# EAGLE board real (EAGLE 9.3.0)

Size 127 x 142.24 mm. Coordinates in mm from the lower left corner, seen from the top.
Outline: 0,0 127,0 127,142.24 0,142.24 0,0
Copper layers (1*16): Top 0.035mm / dielectric 1.5mm / Bottom 0.035mm
Design rules "default": minimum track width 6mil, minimum drill 0.35mm, track to track 6mil, track to pad 6mil, pad to pad 6mil, via to via 6mil, smd to smd 6mil, copper to edge 40mil, drill to drill 6mil, minimum pad ring 10mil, minimum via ring 8mil, stop-mask expansion 4mil, vias tented up to drill 0mil, thermal gap 10mil

## Footprints (pad centres in the part's own frame; a part is rotated, then mirrored left to right if it is on the bottom)
0446200002 = drill 0.889 pad 1.422: 1 3.556,2.54; 2 2.54,4.318; 3 1.524,2.54; 4 0.508,4.318; 5 -0.508,2.54; 6 -1.524,4.318; 7 -2.54,2.54; 8 -3.556,4.318 | drill 1.575 pad 2.286: S@1 -8.103,3.429; S@2 8.103,3.429 | hole 3.251: 6.35,0; -6.35,0
NORCOMP_189-009-513R571 = drill 1.194 square: A1 0,0; B1 0,-6.579 | drill 1.194: A2 -2.769,0; A3 -5.537,0; A4 -8.306,0; A5 -11.074,0; A6 -1.384,-2.845; A7 -4.153,-2.845; A8 -6.921,-2.845; A9 -9.69,-2.845; B2 -2.769,-6.579; B3 -5.537,-6.579; B4 -8.306,-6.579; B5 -11.074,-6.579; B6 -1.384,-9.423; B7 -4.153,-9.423; B8 -6.921,-9.423; B9 -9.69,-9.423 | drill 3.048: SH1 6.96,-1.422; SH2 -18.034,-1.422; SH3 6.96,-9.423; SH4 -18.034,-9.423
D2PAK-KTT = smd 1.05 x 3.82: 1 -2.54,-10.3; 3 2.54,-10.3 | smd 8.55 x 7.48: 2 0,0
POWER_JACK_PTH = drill 2.997 pad 4.318: GND 0,7.7; GNDBREAK 4.7,10.7; PWR 0,13.7
1X02 = drill 1.016 long: 1 -1.27,0; 2 1.27,0
0207/12 = drill 0.813 octagon: 1 -6.35,0; 2 6.35,0
TSSOP28 = smd 0.305 x 0.991: 1 -4.225,-2.918; 2 -3.575,-2.918; 3 -2.925,-2.918; 4 -2.275,-2.918; 5 -1.625,-2.918; 6 -0.975,-2.918; 7 -0.325,-2.918; 8 0.325,-2.918; 9 0.975,-2.918; 10 1.625,-2.918; 11 2.275,-2.918; 12 2.925,-2.918; 13 3.575,-2.918; 14 4.225,-2.918; 15 4.225,2.918; 16 3.575,2.918; 17 2.925,2.918; 18 2.275,2.918; 19 1.625,2.918; 20 0.975,2.918; 21 0.325,2.918; 22 -0.325,2.918; 23 -0.975,2.918; 24 -1.625,2.918; 25 -2.275,2.918; 26 -2.925,2.918; 27 -3.575,2.918; 28 -4.225,2.918
CAN485 = drill 1: 2 -7.62,2.54; 3 -7.62,0; 4 -7.62,-2.54; 5 -7.62,-5.08; 6 -7.62,-7.62; 7 -7.62,-10.16; 8 -7.62,-12.7; 9 -7.62,-15.24; 10 7.62,-15.24; 11 7.62,-12.7; 12 7.62,-10.16; 13 7.62,-7.62; 485A -2.54,-15.24; 485B -5.08,-15.24; A0 7.62,-5.08; A1 7.62,-2.54; A2 7.62,0; A3 7.62,2.54; A4 5.08,6.35; A5 5.08,8.89; A6 -5.08,6.35; A7 -5.08,8.89; CANHI 2.54,-15.24; CANLO 5.08,-15.24; CTS -3.81,15.24; DTR 6.35,15.24; GND1 -7.62,5.08; GND2 7.62,10.16; GND3 0,-15.24; GND4 -6.35,15.24; RAW 7.62,12.7; RST 7.62,7.62; RST1 -7.62,7.62; RXI 1.27,15.24; RXI1 -7.62,10.16; TXO 3.81,15.24; TXO1 -7.62,12.7; VCC 7.62,5.08; VCC1 -1.27,15.24

## Placement (x,y rotation side)
CANBUS  RJ45-0446200002  [0446200002]  10.16,16.51 90 top
FET8-1:J1  NORCOMP_189-009-513R571  [NORCOMP_189-009-513R571]  55.08,17.76 0 top
FET8-1:U$2  NEXFET_CSD18542KTT  [D2PAK-KTT]  57.15,27.94 90 top
FET8-1:U$3  NEXFET_CSD18542KTT  [D2PAK-KTT]  57.15,38.94 90 top
FET8-1:U$4  NEXFET_CSD18542KTT  [D2PAK-KTT]  57.15,49.94 90 top
FET8-1:U$5  NEXFET_CSD18542KTT  [D2PAK-KTT]  57.15,60.94 90 top
FET8-1:U$6  NEXFET_CSD18542KTT  [D2PAK-KTT]  41.91,61.41 270 top
FET8-1:U$7  NEXFET_CSD18542KTT  [D2PAK-KTT]  41.91,50.41 270 top
FET8-1:U$8  NEXFET_CSD18542KTT  [D2PAK-KTT]  41.91,39.41 270 top
FET8-1:U$9  NEXFET_CSD18542KTT  [D2PAK-KTT]  41.91,27.14 270 top
FET8-2:J1  NORCOMP_189-009-513R571  [NORCOMP_189-009-513R571]  46.48,124.75 180 top
FET8-2:U$2  NEXFET_CSD18542KTT  [D2PAK-KTT]  45.72,116.84 270 top
FET8-2:U$3  NEXFET_CSD18542KTT  [D2PAK-KTT]  45.72,105.84 270 top
FET8-2:U$4  NEXFET_CSD18542KTT  [D2PAK-KTT]  45.72,94.84 270 top
FET8-2:U$5  NEXFET_CSD18542KTT  [D2PAK-KTT]  45.72,83.84 270 top
FET8-2:U$6  NEXFET_CSD18542KTT  [D2PAK-KTT]  59.69,83.37 90 top
FET8-2:U$7  NEXFET_CSD18542KTT  [D2PAK-KTT]  59.69,94.37 90 top
FET8-2:U$8  NEXFET_CSD18542KTT  [D2PAK-KTT]  59.69,105.37 90 top
FET8-2:U$9  NEXFET_CSD18542KTT  [D2PAK-KTT]  59.69,116.37 90 top
FET8-3:J1  NORCOMP_189-009-513R571  [NORCOMP_189-009-513R571]  106.05,17.59 0 top
FET8-3:U$2  NEXFET_CSD18542KTT  [D2PAK-KTT]  92.71,60.96 270 top
FET8-3:U$3  NEXFET_CSD18542KTT  [D2PAK-KTT]  92.71,49.96 270 top
FET8-3:U$4  NEXFET_CSD18542KTT  [D2PAK-KTT]  92.71,38.96 270 top
FET8-3:U$5  NEXFET_CSD18542KTT  [D2PAK-KTT]  92.71,27.96 270 top
FET8-3:U$6  NEXFET_CSD18542KTT  [D2PAK-KTT]  106.68,27.49 90 top
FET8-3:U$7  NEXFET_CSD18542KTT  [D2PAK-KTT]  106.68,38.49 90 top
FET8-3:U$8  NEXFET_CSD18542KTT  [D2PAK-KTT]  106.68,49.49 90 top
FET8-3:U$9  NEXFET_CSD18542KTT  [D2PAK-KTT]  106.68,60.49 90 top
FET8-4:J1  NORCOMP_189-009-513R571  [NORCOMP_189-009-513R571]  96.9,124.8 180 top
FET8-4:U$2  NEXFET_CSD18542KTT  [D2PAK-KTT]  110.49,82.55 90 top
FET8-4:U$3  NEXFET_CSD18542KTT  [D2PAK-KTT]  110.49,93.55 90 top
FET8-4:U$4  NEXFET_CSD18542KTT  [D2PAK-KTT]  110.49,104.55 90 top
FET8-4:U$5  NEXFET_CSD18542KTT  [D2PAK-KTT]  110.49,115.55 90 top
FET8-4:U$6  NEXFET_CSD18542KTT  [D2PAK-KTT]  96.52,116.02 270 top
FET8-4:U$7  NEXFET_CSD18542KTT  [D2PAK-KTT]  96.52,105.02 270 top
FET8-4:U$8  NEXFET_CSD18542KTT  [D2PAK-KTT]  96.52,94.02 270 top
FET8-4:U$9  NEXFET_CSD18542KTT  [D2PAK-KTT]  96.52,83.02 270 top
J2  POWER_JACK  [POWER_JACK_PTH]  -2.54,123.19 270 top
JP_CAN_TERM  [1X02]  24.13,92.71 90 top
JP_I2C  [1X02]  6.35,92.71 180 top
JP_RS485_TERM  [1X02]  17.78,92.71 90 top
R_CAN  120  [0207/12]  24.13,105.41 270 top
R_RS485  120  [0207/12]  17.78,105.41 90 top
R_SCL  4.7K  [0207/12]  7.62,105.41 90 top
R_SDA  4.7K  [0207/12]  3.81,105.41 90 top
RS485  RJ45-0446200002  [0446200002]  10.16,38.1 90 top
U1  [TSSOP28]  50.8,72.39 180 top
U2  [TSSOP28]  100.33,72.39 180 top
U$1  CAN485FULL_SOCKET  [CAN485]  12.7,68.58 180 top

## Library data of the parts
CANBUS RS485 = real_library; MF: MOLEX; MPN: 0446200002; OC_FARNELL: 9251910
FET8-1:J1 FET8-2:J1 FET8-3:J1 FET8-4:J1 = real_library; AVAILABILITY: Unavailable; DESCRIPTION: Conn D-Subminiature F/F 9/9 POS 2.77mm Solder RA Thru-Hole 18 Terminal 2 Port; MF: NorComp Inc.; MP: 189-009-513R571; PACKAGE: None; PRICE: None
FET8-1:U$2-FET8-1:U$9 FET8-2:U$2-FET8-2:U$9 FET8-3:U$2-FET8-3:U$9 FET8-4:U$2-FET8-4:U$9 U1 U2 U$1 = real_library
J2 = real_library; PROD_ID: CONN-08197
JP_CAN_TERM JP_I2C JP_RS485_TERM = pinhead
R_CAN R_RS485 R_SCL R_SDA = rcl; SPICEPREFIX: 120

## Nets
ENABLE: U1.23 U2.23 U$1.A0
GND: CANBUS.3 CANBUS.6 FET8-1:J1.A9 FET8-1:J1.B9 FET8-1:J1.SH1 FET8-1:J1.SH2 FET8-1:J1.SH3 FET8-1:J1.SH4 FET8-1:U$2.3 FET8-1:U$3.3 FET8-1:U$4.3 FET8-1:U$5.3 FET8-1:U$6.3 FET8-1:U$7.3 FET8-1:U$8.3 FET8-1:U$9.3 FET8-2:J1.A9 FET8-2:J1.B9 FET8-2:J1.SH1 FET8-2:J1.SH2 FET8-2:J1.SH3 FET8-2:J1.SH4 FET8-2:U$2.3 FET8-2:U$3.3 FET8-2:U$4.3 FET8-2:U$5.3 FET8-2:U$6.3 FET8-2:U$7.3 FET8-2:U$8.3 FET8-2:U$9.3 FET8-3:J1.A9 FET8-3:J1.B9 FET8-3:J1.SH1 FET8-3:J1.SH2 FET8-3:J1.SH3 FET8-3:J1.SH4 FET8-3:U$2.3 FET8-3:U$3.3 FET8-3:U$4.3 FET8-3:U$5.3 FET8-3:U$6.3 FET8-3:U$7.3 FET8-3:U$8.3 FET8-3:U$9.3 FET8-4:J1.A9 FET8-4:J1.B9 FET8-4:J1.SH1 FET8-4:J1.SH2 FET8-4:J1.SH3 FET8-4:J1.SH4 FET8-4:U$2.3 FET8-4:U$3.3 FET8-4:U$4.3 FET8-4:U$5.3 FET8-4:U$6.3 FET8-4:U$7.3 FET8-4:U$8.3 FET8-4:U$9.3 J2.GND J2.GNDBREAK RS485.5 U1.2 U1.3 U1.4 U1.5 U1.14 U1.24 U1.25 U2.1 U2.3 U2.4 U2.5 U2.14 U2.24 U2.25 U$1.GND2
HEATER_A0: FET8-1:J1.A8 FET8-1:J1.B8 FET8-1:U$2.2
HEATER_A1: FET8-1:J1.A7 FET8-1:J1.B7 FET8-1:U$3.2
HEATER_A2: FET8-1:J1.A6 FET8-1:J1.B6 FET8-1:U$4.2
HEATER_A3: FET8-1:J1.A5 FET8-1:J1.B5 FET8-1:U$5.2
HEATER_A4: FET8-1:J1.A4 FET8-1:J1.B4 FET8-1:U$6.2
HEATER_A5: FET8-1:J1.A3 FET8-1:J1.B3 FET8-1:U$7.2
HEATER_A6: FET8-1:J1.A2 FET8-1:J1.B2 FET8-1:U$8.2
HEATER_A7: FET8-1:J1.A1 FET8-1:J1.B1 FET8-1:U$9.2
HEATER_B0: FET8-2:J1.A8 FET8-2:J1.B8 FET8-2:U$2.2
HEATER_B1: FET8-2:J1.A7 FET8-2:J1.B7 FET8-2:U$3.2
HEATER_B2: FET8-2:J1.A6 FET8-2:J1.B6 FET8-2:U$4.2
HEATER_B3: FET8-2:J1.A5 FET8-2:J1.B5 FET8-2:U$5.2
HEATER_B4: FET8-2:J1.A4 FET8-2:J1.B4 FET8-2:U$6.2
HEATER_B5: FET8-2:J1.A3 FET8-2:J1.B3 FET8-2:U$7.2
HEATER_B6: FET8-2:J1.A2 FET8-2:J1.B2 FET8-2:U$8.2
HEATER_B7: FET8-2:J1.A1 FET8-2:J1.B1 FET8-2:U$9.2
HEATER_C0: FET8-3:J1.A8 FET8-3:J1.B8 FET8-3:U$2.2
HEATER_C1: FET8-3:J1.A7 FET8-3:J1.B7 FET8-3:U$3.2
HEATER_C2: FET8-3:J1.A6 FET8-3:J1.B6 FET8-3:U$4.2
HEATER_C3: FET8-3:J1.A5 FET8-3:J1.B5 FET8-3:U$5.2
HEATER_C4: FET8-3:J1.A4 FET8-3:J1.B4 FET8-3:U$6.2
HEATER_C5: FET8-3:J1.A3 FET8-3:J1.B3 FET8-3:U$7.2
HEATER_C6: FET8-3:J1.A2 FET8-3:J1.B2 FET8-3:U$8.2
HEATER_C7: FET8-3:J1.A1 FET8-3:J1.B1 FET8-3:U$9.2
HEATER_D0: FET8-4:J1.A8 FET8-4:J1.B8 FET8-4:U$2.2
HEATER_D1: FET8-4:J1.A7 FET8-4:J1.B7 FET8-4:U$3.2
HEATER_D2: FET8-4:J1.A6 FET8-4:J1.B6 FET8-4:U$4.2
HEATER_D3: FET8-4:J1.A5 FET8-4:J1.B5 FET8-4:U$5.2
HEATER_D4: FET8-4:J1.A4 FET8-4:J1.B4 FET8-4:U$6.2
HEATER_D5: FET8-4:J1.A3 FET8-4:J1.B3 FET8-4:U$7.2
HEATER_D6: FET8-4:J1.A2 FET8-4:J1.B2 FET8-4:U$8.2
HEATER_D7: FET8-4:J1.A1 FET8-4:J1.B1 FET8-4:U$9.2
N$1: JP_CAN_TERM.2 R_CAN.2
N$3: CANBUS.7 JP_CAN_TERM.1 U$1.CANHI
N$4: CANBUS.2 R_CAN.1 U$1.CANLO
N$5: R_RS485.1 RS485.4 U$1.485A
N$6: JP_RS485_TERM.2 R_RS485.2
N$7: JP_RS485_TERM.1 RS485.3 U$1.485B
N$16: JP_I2C.2 R_SCL.1 U1.26 U2.26 U$1.2
N$19: JP_I2C.1 R_SDA.1 U1.27 U2.27 U$1.3
PWM_A0: FET8-1:U$2.1 U1.6
PWM_A1: FET8-1:U$3.1 U1.7
PWM_A2: FET8-1:U$4.1 U1.8
PWM_A3: FET8-1:U$5.1 U1.9
PWM_A4: FET8-1:U$6.1 U1.10
PWM_A5: FET8-1:U$7.1 U1.11
PWM_A6: FET8-1:U$8.1 U1.12
PWM_A7: FET8-1:U$9.1 U1.13
PWM_B0: FET8-2:U$2.1 U1.15
PWM_B1: FET8-2:U$3.1 U1.16
PWM_B2: FET8-2:U$4.1 U1.17
PWM_B3: FET8-2:U$5.1 U1.18
PWM_B4: FET8-2:U$6.1 U1.19
PWM_B5: FET8-2:U$7.1 U1.20
PWM_B6: FET8-2:U$8.1 U1.21
PWM_B7: FET8-2:U$9.1 U1.22
PWM_C0: FET8-3:U$2.1 U2.6
PWM_C1: FET8-3:U$3.1 U2.7
PWM_C2: FET8-3:U$4.1 U2.8
PWM_C3: FET8-3:U$5.1 U2.9
PWM_C4: FET8-3:U$6.1 U2.10
PWM_C5: FET8-3:U$7.1 U2.11
PWM_C6: FET8-3:U$8.1 U2.12
PWM_C7: FET8-3:U$9.1 U2.13
PWM_D0: FET8-4:U$2.1 U2.15
PWM_D1: FET8-4:U$3.1 U2.16
PWM_D2: FET8-4:U$4.1 U2.17
PWM_D3: FET8-4:U$5.1 U2.18
PWM_D4: FET8-4:U$6.1 U2.19
PWM_D5: FET8-4:U$7.1 U2.20
PWM_D6: FET8-4:U$8.1 U2.21
PWM_D7: FET8-4:U$9.1 U2.22
VCC: J2.PWR R_SCL.2 R_SDA.2 U1.1 U1.28 U2.2 U2.28 U$1.VCC

## Tracks (layer width: path | path; a pad name or v marks a point on that pad's centre or on a via)
ENABLE  (2 unrouted)
GND  (75 unrouted)
HEATER_A0  (2 unrouted)
HEATER_A1  (2 unrouted)
HEATER_A2  (2 unrouted)
HEATER_A3  (2 unrouted)
HEATER_A4  (2 unrouted)
HEATER_A5  (2 unrouted)
HEATER_A6  (2 unrouted)
HEATER_A7  (2 unrouted)
HEATER_B0  (2 unrouted)
HEATER_B1  (2 unrouted)
HEATER_B2  (2 unrouted)
HEATER_B3  (2 unrouted)
HEATER_B4  (2 unrouted)
HEATER_B5  (2 unrouted)
HEATER_B6  (2 unrouted)
HEATER_B7  (2 unrouted)
HEATER_C0  (2 unrouted)
HEATER_C1  (2 unrouted)
HEATER_C2  (2 unrouted)
HEATER_C3  (2 unrouted)
HEATER_C4  (2 unrouted)
HEATER_C5  (2 unrouted)
HEATER_C6  (2 unrouted)
HEATER_C7  (2 unrouted)
HEATER_D0  (2 unrouted)
HEATER_D1  (2 unrouted)
HEATER_D2  (2 unrouted)
HEATER_D3  (2 unrouted)
HEATER_D4  (2 unrouted)
HEATER_D5  (2 unrouted)
HEATER_D6  (2 unrouted)
HEATER_D7  (2 unrouted)
N$1  (1 unrouted)
N$3  (2 unrouted)
N$4  (2 unrouted)
N$5  (2 unrouted)
N$6  (1 unrouted)
N$7  (2 unrouted)
N$16  (4 unrouted)
N$19  (4 unrouted)
PWM_A0  (1 unrouted)
PWM_A1  (1 unrouted)
PWM_A2  (1 unrouted)
PWM_A3  (1 unrouted)
PWM_A4  (1 unrouted)
PWM_A5  (1 unrouted)
PWM_A6  (1 unrouted)
PWM_A7  (1 unrouted)
PWM_B0  (1 unrouted)
PWM_B1  (1 unrouted)
PWM_B2  (1 unrouted)
PWM_B3  (1 unrouted)
PWM_B4  (1 unrouted)
PWM_B5  (1 unrouted)
PWM_B6  (1 unrouted)
PWM_B7  (1 unrouted)
PWM_C0  (1 unrouted)
PWM_C1  (1 unrouted)
PWM_C2  (1 unrouted)
PWM_C3  (1 unrouted)
PWM_C4  (1 unrouted)
PWM_C5  (1 unrouted)
PWM_C6  (1 unrouted)
PWM_C7  (1 unrouted)
PWM_D0  (1 unrouted)
PWM_D1  (1 unrouted)
PWM_D2  (1 unrouted)
PWM_D3  (1 unrouted)
PWM_D4  (1 unrouted)
PWM_D5  (1 unrouted)
PWM_D6  (1 unrouted)
PWM_D7  (1 unrouted)
VCC  (7 unrouted)